# Altium PCB PCB_RGB line v0.0.1_2021-07-07.pcbdoc
Units mil, origin at the board's own origin, x right, y up, seen from the top; angles counter-clockwise.
Board outline 3210.59 x 2210 mil, 2 copper layers (Top Layer, Bottom Layer); 16 components, 37 nets, 73 pads, 8 vias.
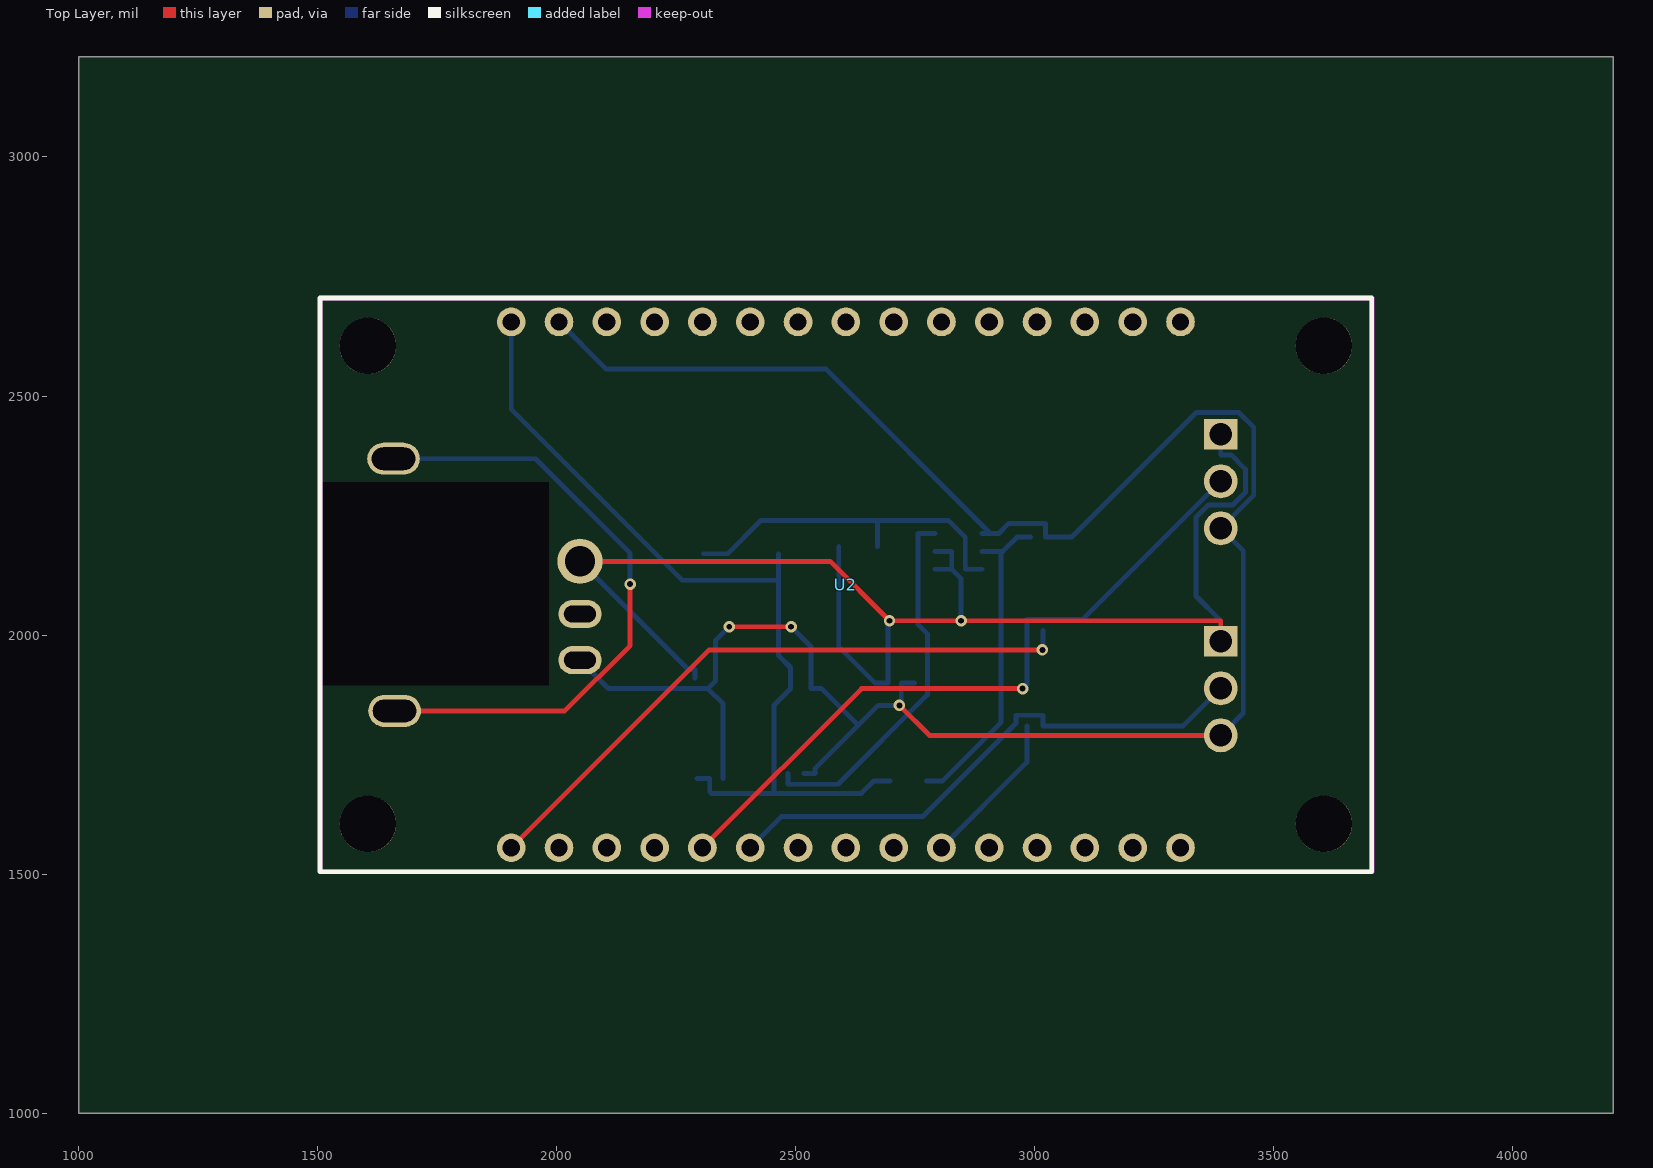
[diagram p0: Top Layer view]
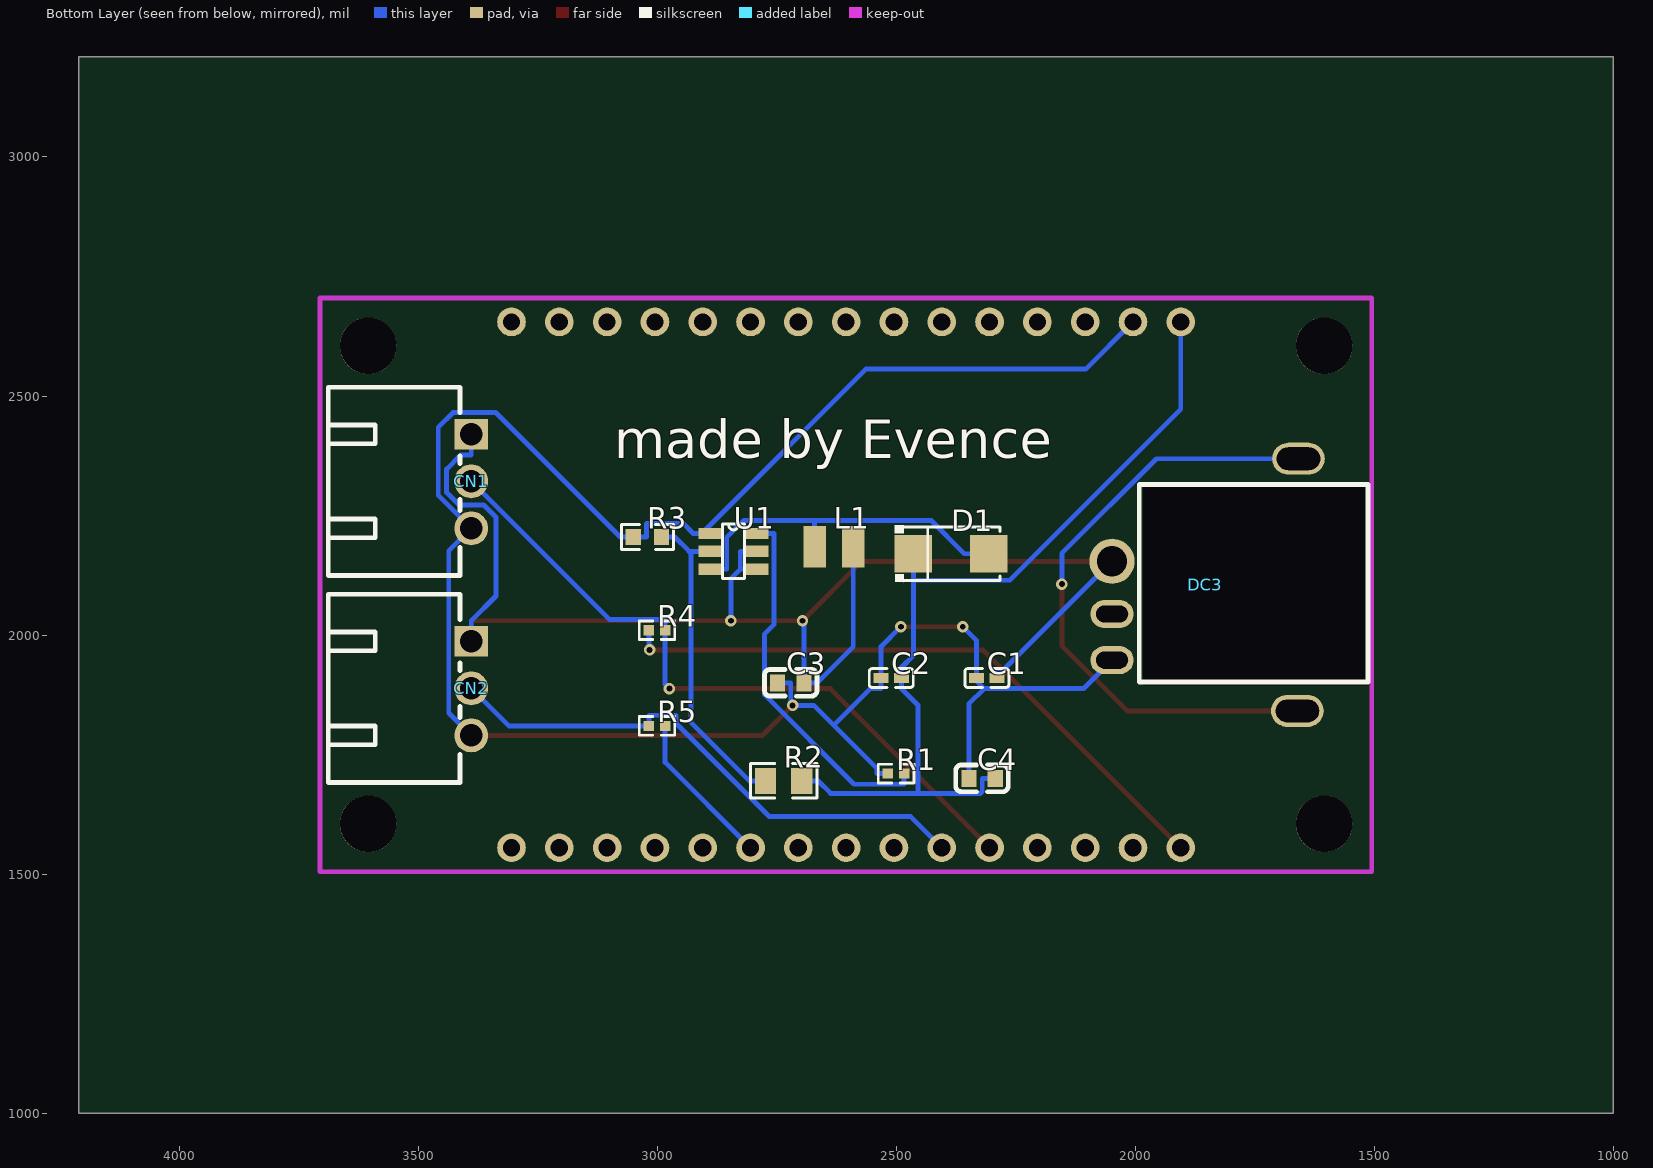
[diagram p1: Bottom Layer view, seen from below]

## Layer stack, top to bottom
Top Layer: signal copper (thickness not stored)
Dielectric: dielectric 12.6, FR-4, Dk 4.8
Bottom Layer: signal copper (thickness not stored)

## Board outline
4210.59,1000 1000,1000 1000,3210 4210.59,3210

## Components (designator, comment, footprint, x,y, rotation, side; value= is the part's Value field where it differs from the comment)
C1 "100nF" C0402 2310.59,1910 r0 bottom
C2 "100nF" C0402 2510.59,1910 r0 bottom
C3 "22UF" C0603 2720.59,1900 r0 bottom
C4 "22UF" C0603 2320.59,1700 r0 bottom
CN1 "1" CONN-TH_3P-P2.50_XH-3A 3389.25,2321.53 r90 bottom
CN2 "2" CONN-TH_3P-P2.50_XH-3A 3389.25,1888.46 r90 bottom
D1 "SS34-A" SMA_L4.3-W2.6-LS5.2-RD 2385.59,2170 r0 bottom
DC3 "DC-C033D-5.5A-2.5" DC-IN-TH_DC-C033D-5.5A-2.5 1853.82,2105 r90 bottom
L1 "3.3uH" IND-SMD_L2.5-W2.0 2630.59,2185 r0 bottom
R1 "20k" R0402 2500.59,1710 r0 bottom
R2 "130K" R0805 2735.59,1695 r0 bottom
R3 "10k" R0603 3020.59,2205 r0 bottom
R4 "20k" R0402 3000.59,2010 r0 bottom
R5 "20k" R0402 3000.59,1810 r0 bottom
U1 "PW5300" PW5300 2840.59,2175 r0 bottom
U2 "nodemcu" NODEMCU 2405,2105 r270 top

## Footprints (in the part's own frame and the unit in brackets; to place one, negate y for a bottom-side part, rotate by r counter-clockwise, add the part's x,y. Pads: shape width x height; smd on the part's side, far side on the other; paste and mask are expansions set on the pad)
C0402 [mm]
  rect 0.79x0.54 smd: 1(0.545,0) 2(-0.545,0)
  silkscreen extent -1.17,-0.5 1.17,0.5
C0603 [mm]
  rect 0.8x0.9 smd: 1(0.7,0) 2(-0.7,0)
  silkscreen extent -1.39,-0.72 1.41,0.71
CONN-TH_3P-P2.50_XH-3A [mm]
  rect 1.6x1.8 hole 1.2: 1(2.5,0)
  round 1.8 hole 1.2: 2(0,0) 3(-2.5,0)
  silkscreen extent -5,0.6 5,7.6
DC-IN-TH_DC-C033D-5.5A-2.5 [mm]
  oval 1.5x2.3 hole 0.9 slot 1.7 at 90 deg: 2(-4,4.953) 3(-1.55,4.953)
  round 2.4 hole 1.6: 4(1.25,4.953)
  oval 1.7x2.8 hole 1.2 slot 2.3 at 90 deg: 5(-6.7,-4.897) 5(6.7,-4.953)
  Multi-Layer board cut-out: 5.457,3.302 -5.338,3.302 -5.338,-8.763 5.457,-8.763
  silkscreen extent -5.17,-8.65 5.33,3.5
IND-SMD_L2.5-W2.0 [mm]
  rect 1.2x2.2 smd: 1(-1.028,0) 2(1.028,0)
NODEMCU [mil]
  round 60 hole 36: 1(550,900) 2(550,800) 3(550,700) 4(550,600) 5(550,500) 6(550,400) 7(550,300) 8(550,200) 9(550,100) 10(550,0) 11(550,-100) 12(550,-200) 13(550,-300) 14(550,-400) 15(550,-500) 16(-550,900) 17(-550,800) 18(-550,700) 19(-550,600) 20(-550,500) 21(-550,400) 22(-550,300) 23(-550,200) 24(-550,100) 25(-550,0) 26(-550,-100) 27(-550,-200) 28(-550,-300) 29(-550,-400) 30(-550,-500)
  round 118.11 hole 118.11 unplated: ""(-500,1200) ""(-500,-800) ""(500,1200) ""(500,-800)
  silkscreen extent -600,-900 600,1300
PW5300 [mm]
  rect 1.2x0.6 smd: 1(1.25,-0.95) 2(1.25,0) 3(1.25,0.95) 4(-1.25,0.95) 5(-1.25,0) 6(-1.25,-0.95)
  silkscreen extent -0.59,-1.45 0.59,1.45
R0402 [mm]
  rect 0.566x0.54 smd: 1(0.433,0) 2(-0.433,0)
  silkscreen extent -0.94,-0.5 0.94,0.5
R0603 [mil]
  rect 31.75x34.02 smd: 1(29.66,0) 2(-29.65,0)
  silkscreen extent -55,-26 55,26
R0805 [mil]
  rect 44.59x54.21 smd: 1(38.04,0) 2(-38.04,0)
  silkscreen extent -69,-36 69,36
SMA_L4.3-W2.6-LS5.2-RD [mm]
  rect 2x2 smd: 1(2,0) 2(-2,0)
  silkscreen extent -2.6,-1.5 2.98,1.5

## Via types
v1: diameter 24.02, hole 12.2, Top Layer to Bottom Layer, 8 vias

## Nets (pads, with @x,y where several pads share a name; then routed paths per layer and width w, separated by ;. In a path a pad name is that pad's centre, name@x,y a point inside that pad or via, vN(x,y) a via of type N, cw(c..) or ccw(c..) an arc to the next point about the centre after c; other vN are vias at no path point)
+5V: C1.2 C3.2 CN1.1 CN2.1 DC3.4 L1.1 U1.4 U1.5 | length 3046.3
  Top Layer w10.24: DC3.4 2571.99,2154.2 v1(2696.29,2029.9) v1(2845.99,2029.9) 3389.29,2029.9 CN2.1@3389.29,1986.9
  Bottom Layer w10.24: DC3.4 2275.09,1928 2289.09,1928 C1.2 ; L1.1 2590.09,1975.7 2665.79,1900 C3.2 2692.99,2026.7 v1(2696.29,2029.9) ; U1.4 2826.49,2137.6 ; U1.5 2826.49,2175 2826.49,2137.6 ; v1(2845.99,2029.9) 2845.99,2118.1 2826.49,2137.6 ; CN2.1@3389.29,1986.9 3389.29,2029.9 3337.49,2081.7 3337.49,2246.2 3363.59,2272.3 3414.89,2272.3 3440.69,2298.1 3440.69,2347 3410.79,2376.9 3389.29,2376.9 CN1.1@3389.29,2419.9
C2_2: C2.2 C4.2 D1.1 R2.2 U2.30 | length 1860
  Bottom Layer w10.24: U2.30 1904.99,2472.2 2262.59,2114.6 2464.39,2114.6 ; C4.2 2320.29,1700 2320.29,1672.7 2324.19,1668.9 2454.79,1668.9 ; D1.1@2464.39,2170 2464.39,2114.6 ; R2.2@2697.59,1695 2663.79,1695 2637.59,1668.9 2454.79,1668.9 ; 2454.79,1668.9 2454.79,1853.5 2489.09,1887.9 C2.2 2489.09,1916.9 2489.09,1932.1 2464.39,1956.9 2464.39,2114.6
DC3_3: DC3.3
DC3_5: DC3.5 | length 1319.3
  Top Layer w10.24: DC3.5@1660.99,1841.2 2016.99,1841.2 2153.69,1977.9 v1(2153.69,2106.6)
  Bottom Layer w10.24: DC3.5@1658.79,2368.8 1955.89,2368.8 2153.69,2171 v1(2153.69,2106.6)
GND: C1.1 C2.1 C3.1 C4.1 CN1.3 CN2.3 DC3.2 R1.1 R3.1 U1.1 U2.29 | length 4610.3
  Top Layer w10.24: v1(2360.99,2017.3) v1(2490.49,2017.3) ; v1(2717.09,1852.8) 2779.99,1790 CN2.3@3389.29,1790
  Bottom Layer w10.24: U2.29 2103.89,2556.1 2563.69,2556.1 U1.1@2907.39,2212.4 ; DC3.2 2108.49,1887.8 2316.19,1887.8 ; C4.1@2348.19,1700 2348.19,1855.9 2316.19,1887.8 ; v1(2360.99,2017.3) 2332.09,1988.4 2332.09,1910 2332.09,1906.8 2332.09,1903.7 2316.19,1887.8 ; v1(2490.49,2017.3) 2532.09,1975.7 2532.09,1910 2532.09,1887.9 2554.19,1887.9 2630.99,1811.1 ; R1.1@2517.69,1710 2540.29,1710 2540.29,1720.3 2630.99,1811.1 ; C3.1@2748.19,1900 2720.89,1900 2720.89,1856.6 v1(2717.09,1852.8) 2672.79,1852.8 2630.99,1811.1 ; U1.1 U1.1@2907.39,2212.4 ; CN2.3@3389.29,1790 3436.19,1837 3436.19,2176.2 3389.29,2223.1 3458.29,2292.1 3458.29,2434.4 3427.09,2465.5 3338.19,2465.5 3077.59,2205 3050.29,2205 3036.59,2205 3022.89,2205 3022.89,2232.4 3021.69,2233.5 2946.09,2233.5 2924.99,2212.4 U1.1@2907.39,2212.4
S$1862: 
U1_2: R2.1 R3.2 U1.2 | length 677.8
  Bottom Layer w10.24: R2.1@2773.69,1695 2807.49,1695 2929.29,1816.9 2929.29,2175 ; U1.2 2929.29,2175 ; R3.2@2990.99,2205 2963.59,2205 2933.59,2175 2929.29,2175
U1_3: D1.2 L1.2 U1.3 | length 747.9
  Bottom Layer w10.24: D1.2@2306.89,2170 2357.69,2170 2427.59,2239.8 2671.09,2239.8 ; L1.2 2671.09,2235.6 2671.09,2239.8 ; U1.3 2854.69,2137.6 2854.69,2204.2 2819.09,2239.8 2671.09,2239.8
U1_6: R1.2 U1.6 | length 772
  Bottom Layer w10.24: R1.2 2483.59,1687.9 2588.59,1687.9 2775.39,1874.7 2775.39,2002.4 2756.29,2021.6 2756.29,2212.4 U1.6
U2_1: U2.1
U2_2: U2.2
U2_3: U2.3
U2_4: U2.4
U2_5: U2.5
U2_6: R5.2 U2.6 | length 329
  Bottom Layer w10.24: U2.6 2983.59,1733.5 R5.2
U2_7: U2.7
U2_8: U2.8
U2_9: U2.9
U2_10: CN2.2 R5.1 U2.10 | length 1163.2
  Bottom Layer w10.24: U2.10 2470.59,1620.6 2766.39,1620.6 2960.89,1815.1 2960.89,1831.4 2961.69,1832.1 3017.69,1832.1 3017.69,1810 3310.79,1810 CN2.2@3389.29,1888.5
U2_11: CN1.2 R4.2 U2.11 | length 1481
  Top Layer w10.24: U2.11 2637.99,1887.9 v1(2974.59,1887.9)
  Bottom Layer w10.24: v1(2974.59,1887.9) 2983.59,1896.9 R4.2 2983.59,2015.5 2983.59,2032.1 3099.89,2032.1 CN1.2@3389.29,2321.5
U2_12: U2.12
U2_13: U2.13
U2_14: U2.14
U2_15: R4.1 U2.15 | length 1324.2
  Top Layer w10.24: U2.15 2318.99,1969 v1(3015.99,1969)
  Bottom Layer w10.24: v1(3015.99,1969) 3017.69,1970.7 R4.1@3017.69,2010
U2_16: U2.16
U2_17: U2.17
U2_18: U2.18
U2_19: U2.19
U2_20: U2.20
U2_21: U2.21
U2_22: U2.22
U2_23: U2.23
U2_24: U2.24
U2_25: U2.25
U2_26: U2.26
U2_27: U2.27
U2_28: U2.28
pads on no net: U2.

## Silkscreen, mask and mechanical layers (free items; w line width, h text height)
Bottom Overlay:
  text "made by Evence" at 3090.59,2370 h80